# EAGLE board 09B-11-A1-01 (EAGLE 6.3)
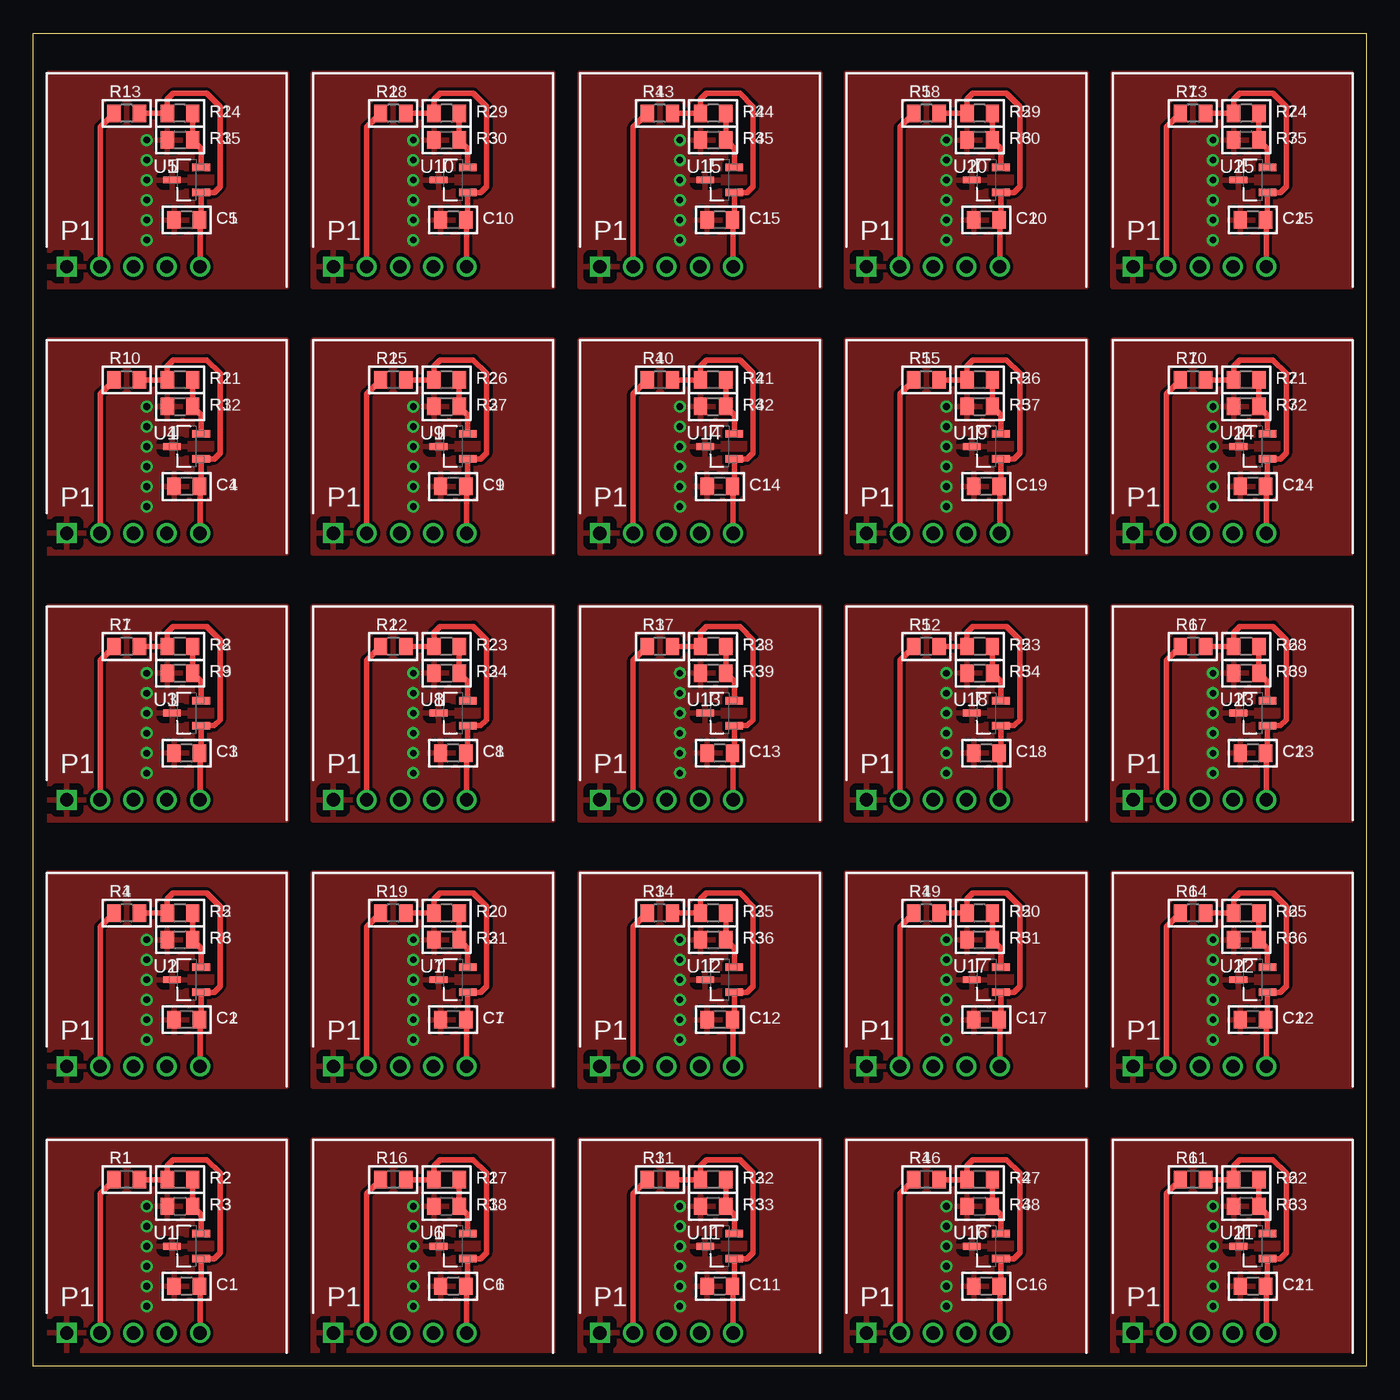
[diagram p0: board, top side]
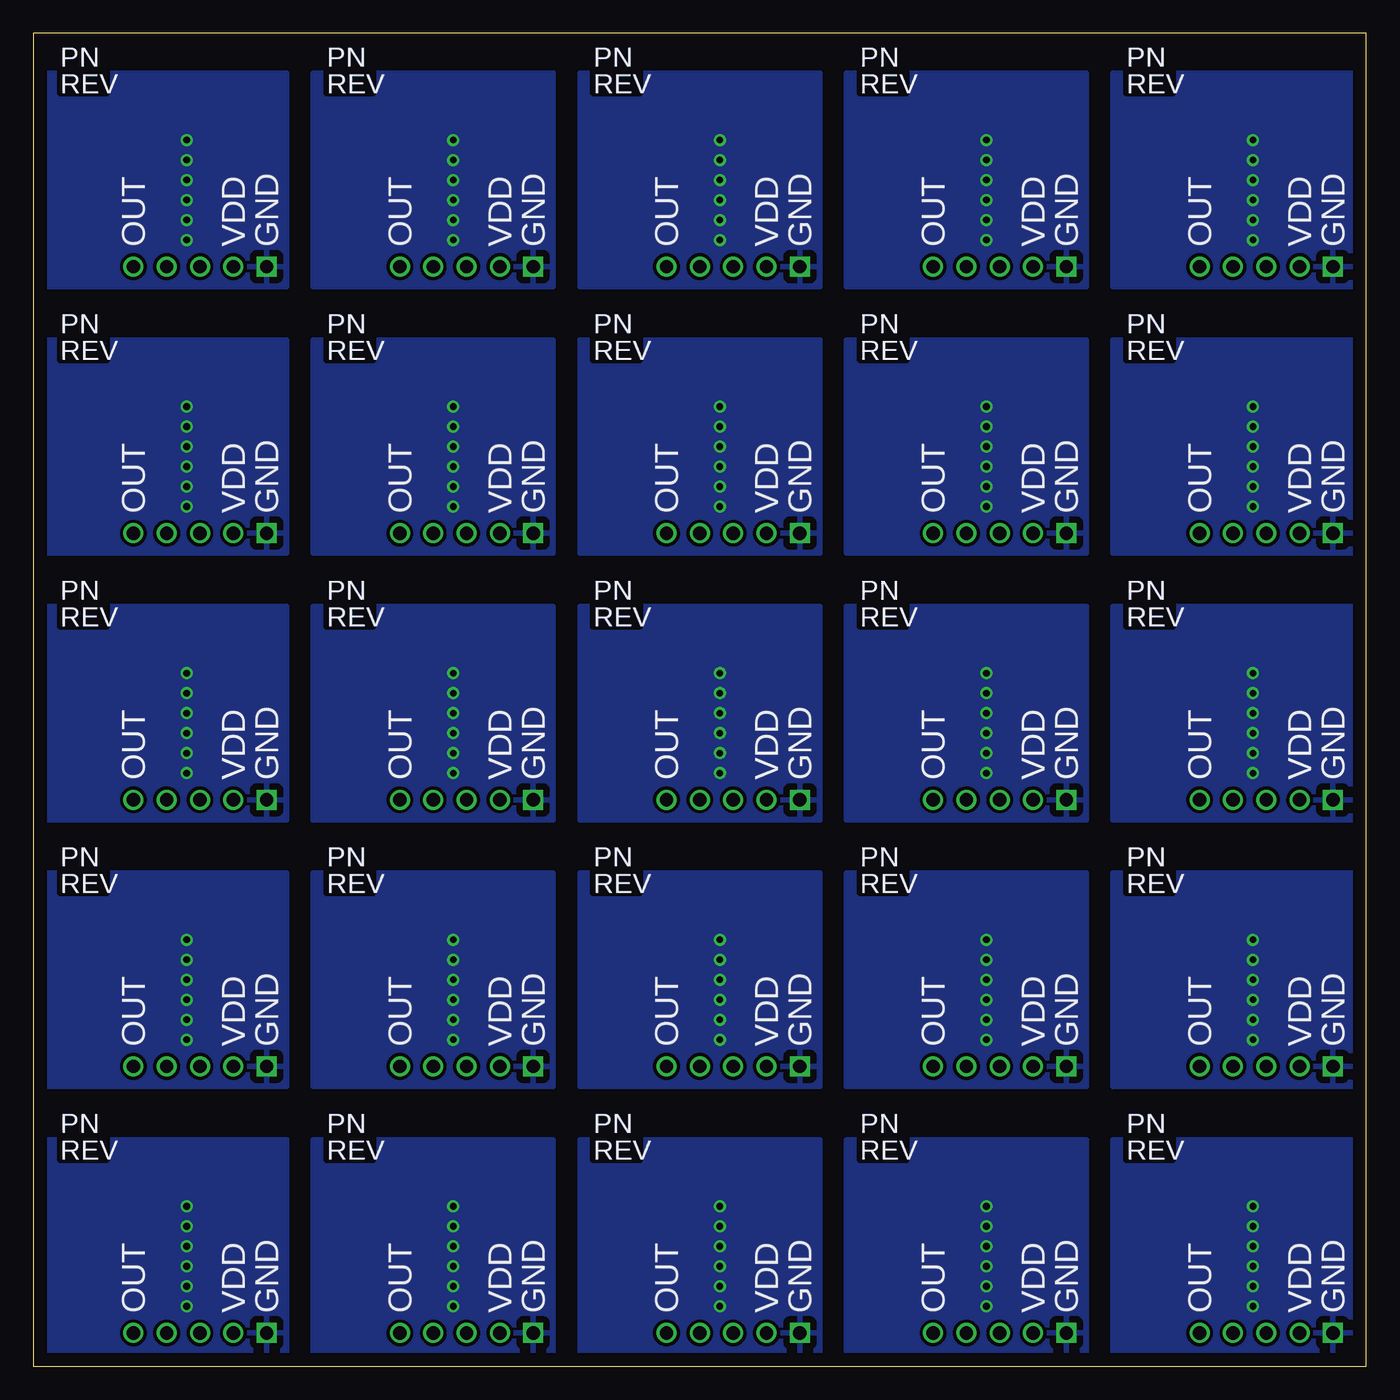
[diagram p1: board, bottom side, seen from below]

Size 100 x 100 mm. Coordinates in mm from the lower left corner, seen from the top.
Outline: 0,0 0,100 100,100 100,0 0,0
Copper layers (1*16): Top 0.035mm / dielectric 1.5mm / Bottom 0.035mm
Design rules "minipcb": minimum track width 0.2mm, minimum drill 0.5mm, track to track 0.25mm, track to pad 0.5mm, pad to pad 0.5mm, via to via 0.5mm, smd to smd 0.15mm, copper to edge 1mm, drill to drill 1mm, minimum pad ring 0.2mm, minimum via ring 0.2mm, stop-mask expansion 0.1mm, vias tented up to drill 0.6mm, thermal gap 0.5mm

## Footprints (pad centres in the part's own frame; a part is rotated, then mirrored left to right if it is on the bottom)
C0805 = smd 1 x 1.3: 1ASD -0.95,0; 2ASDF 0.95,0
PINS_1X5 = drill 1 square: 1 0,0 | drill 1: 2 2.5,0; 3 5,0; 4 7.5,0; 5 10,0
R0805 = smd 1 x 1.3: 1 -0.95,0; 2 0.95,0
SOT95P237X112-3N = smd 1.321 x 0.559: 1 -1.092,0.94; 2 -1.092,-0.94 | smd 1.321 x 0.508: 3 1.092,0

## Placement (x,y rotation side)
C1  [C0805]  11.5,6 180 top
C2  [C0805]  11.5,26 180 top
C3  [C0805]  11.5,46 180 top
C4  [C0805]  11.5,66 180 top
C5  [C0805]  11.5,86 180 top
C6  [C0805]  31.5,6 180 top
C7  [C0805]  31.5,26 180 top
C8  [C0805]  31.5,46 180 top
C9  [C0805]  31.5,66 180 top
C10  [C0805]  31.5,86 180 top
C11  [C0805]  51.5,6 180 top
C12  [C0805]  51.5,26 180 top
C13  [C0805]  51.5,46 180 top
C14  [C0805]  51.5,66 180 top
C15  [C0805]  51.5,86 180 top
C16  [C0805]  71.5,6 180 top
C17  [C0805]  71.5,26 180 top
C18  [C0805]  71.5,46 180 top
C19  [C0805]  71.5,66 180 top
C20  [C0805]  71.5,86 180 top
C21  [C0805]  91.5,6 180 top
C22  [C0805]  91.5,26 180 top
C23  [C0805]  91.5,46 180 top
C24  [C0805]  91.5,66 180 top
C25  [C0805]  91.5,86 180 top
P1  [PINS_1X5]  2.5,2.5 0 top
P2  [PINS_1X5]  2.5,22.5 0 top
P3  [PINS_1X5]  2.5,42.5 0 top
P4  [PINS_1X5]  2.5,62.5 0 top
P5  [PINS_1X5]  2.5,82.5 0 top
P6  [PINS_1X5]  22.5,2.5 0 top
P7  [PINS_1X5]  22.5,22.5 0 top
P8  [PINS_1X5]  22.5,42.5 0 top
P9  [PINS_1X5]  22.5,62.5 0 top
P10  [PINS_1X5]  22.5,82.5 0 top
P11  [PINS_1X5]  42.5,2.5 0 top
P12  [PINS_1X5]  42.5,22.5 0 top
P13  [PINS_1X5]  42.5,42.5 0 top
P14  [PINS_1X5]  42.5,62.5 0 top
P15  [PINS_1X5]  42.5,82.5 0 top
P16  [PINS_1X5]  62.5,2.5 0 top
P17  [PINS_1X5]  62.5,22.5 0 top
P18  [PINS_1X5]  62.5,42.5 0 top
P19  [PINS_1X5]  62.5,62.5 0 top
P20  [PINS_1X5]  62.5,82.5 0 top
P21  [PINS_1X5]  82.5,2.5 0 top
P22  [PINS_1X5]  82.5,22.5 0 top
P23  [PINS_1X5]  82.5,42.5 0 top
P24  [PINS_1X5]  82.5,62.5 0 top
P25  [PINS_1X5]  82.5,82.5 0 top
PCB1  [PCB20-20]  0,0 0 top
PCB2  [PCB20-20]  0,20 0 top
PCB3  [PCB20-20]  0,40 0 top
PCB4  [PCB20-20]  0,60 0 top
PCB5  [PCB20-20]  0,80 0 top
PCB6  [PCB20-20]  20,0 0 top
PCB7  [PCB20-20]  20,20 0 top
PCB8  [PCB20-20]  20,40 0 top
PCB9  [PCB20-20]  20,60 0 top
PCB10  [PCB20-20]  20,80 0 top
PCB11  [PCB20-20]  40,0 0 top
PCB12  [PCB20-20]  40,20 0 top
PCB13  [PCB20-20]  40,40 0 top
PCB14  [PCB20-20]  40,60 0 top
PCB15  [PCB20-20]  40,80 0 top
PCB16  [PCB20-20]  60,0 0 top
PCB17  [PCB20-20]  60,20 0 top
PCB18  [PCB20-20]  60,40 0 top
PCB19  [PCB20-20]  60,60 0 top
PCB20  [PCB20-20]  60,80 0 top
PCB21  [PCB20-20]  80,0 0 top
PCB22  [PCB20-20]  80,20 0 top
PCB23  [PCB20-20]  80,40 0 top
PCB24  [PCB20-20]  80,60 0 top
PCB25  [PCB20-20]  80,80 0 top
R1  [R0805]  7,14 180 top
R2  [R0805]  11,14 180 top
R3  [R0805]  11,12 0 top
R4  [R0805]  7,34 180 top
R5  [R0805]  11,34 180 top
R6  [R0805]  11,32 0 top
R7  [R0805]  7,54 180 top
R8  [R0805]  11,54 180 top
R9  [R0805]  11,52 0 top
R10  [R0805]  7,74 180 top
R11  [R0805]  11,74 180 top
R12  [R0805]  11,72 0 top
R13  [R0805]  7,94 180 top
R14  [R0805]  11,94 180 top
R15  [R0805]  11,92 0 top
R16  [R0805]  27,14 180 top
R17  [R0805]  31,14 180 top
R18  [R0805]  31,12 0 top
R19  [R0805]  27,34 180 top
R20  [R0805]  31,34 180 top
R21  [R0805]  31,32 0 top
R22  [R0805]  27,54 180 top
R23  [R0805]  31,54 180 top
R24  [R0805]  31,52 0 top
R25  [R0805]  27,74 180 top
R26  [R0805]  31,74 180 top
R27  [R0805]  31,72 0 top
R28  [R0805]  27,94 180 top
R29  [R0805]  31,94 180 top
R30  [R0805]  31,92 0 top
R31  [R0805]  47,14 180 top
R32  [R0805]  51,14 180 top
R33  [R0805]  51,12 0 top
R34  [R0805]  47,34 180 top
R35  [R0805]  51,34 180 top
R36  [R0805]  51,32 0 top
R37  [R0805]  47,54 180 top
R38  [R0805]  51,54 180 top
R39  [R0805]  51,52 0 top
R40  [R0805]  47,74 180 top
R41  [R0805]  51,74 180 top
R42  [R0805]  51,72 0 top
R43  [R0805]  47,94 180 top
R44  [R0805]  51,94 180 top
R45  [R0805]  51,92 0 top
R46  [R0805]  67,14 180 top
R47  [R0805]  71,14 180 top
R48  [R0805]  71,12 0 top
R49  [R0805]  67,34 180 top
R50  [R0805]  71,34 180 top
R51  [R0805]  71,32 0 top
R52  [R0805]  67,54 180 top
R53  [R0805]  71,54 180 top
R54  [R0805]  71,52 0 top
R55  [R0805]  67,74 180 top
R56  [R0805]  71,74 180 top
R57  [R0805]  71,72 0 top
R58  [R0805]  67,94 180 top
R59  [R0805]  71,94 180 top
R60  [R0805]  71,92 0 top
R61  [R0805]  87,14 180 top
R62  [R0805]  91,14 180 top
R63  [R0805]  91,12 0 top
R64  [R0805]  87,34 180 top
R65  [R0805]  91,34 180 top
R66  [R0805]  91,32 0 top
R67  [R0805]  87,54 180 top
R68  [R0805]  91,54 180 top
R69  [R0805]  91,52 0 top
R70  [R0805]  87,74 180 top
R71  [R0805]  91,74 180 top
R72  [R0805]  91,72 0 top
R73  [R0805]  87,94 180 top
R74  [R0805]  91,94 180 top
R75  [R0805]  91,92 0 top
U1  TL432BQDBZRQ1  [SOT95P237X112-3N]  11.5,9 180 top
U2  TL432BQDBZRQ1  [SOT95P237X112-3N]  11.5,29 180 top
U3  TL432BQDBZRQ1  [SOT95P237X112-3N]  11.5,49 180 top
U4  TL432BQDBZRQ1  [SOT95P237X112-3N]  11.5,69 180 top
U5  TL432BQDBZRQ1  [SOT95P237X112-3N]  11.5,89 180 top
U6  TL432BQDBZRQ1  [SOT95P237X112-3N]  31.5,9 180 top
U7  TL432BQDBZRQ1  [SOT95P237X112-3N]  31.5,29 180 top
U8  TL432BQDBZRQ1  [SOT95P237X112-3N]  31.5,49 180 top
U9  TL432BQDBZRQ1  [SOT95P237X112-3N]  31.5,69 180 top
U10  TL432BQDBZRQ1  [SOT95P237X112-3N]  31.5,89 180 top
U11  TL432BQDBZRQ1  [SOT95P237X112-3N]  51.5,9 180 top
U12  TL432BQDBZRQ1  [SOT95P237X112-3N]  51.5,29 180 top
U13  TL432BQDBZRQ1  [SOT95P237X112-3N]  51.5,49 180 top
U14  TL432BQDBZRQ1  [SOT95P237X112-3N]  51.5,69 180 top
U15  TL432BQDBZRQ1  [SOT95P237X112-3N]  51.5,89 180 top
U16  TL432BQDBZRQ1  [SOT95P237X112-3N]  71.5,9 180 top
U17  TL432BQDBZRQ1  [SOT95P237X112-3N]  71.5,29 180 top
U18  TL432BQDBZRQ1  [SOT95P237X112-3N]  71.5,49 180 top
U19  TL432BQDBZRQ1  [SOT95P237X112-3N]  71.5,69 180 top
U20  TL432BQDBZRQ1  [SOT95P237X112-3N]  71.5,89 180 top
U21  TL432BQDBZRQ1  [SOT95P237X112-3N]  91.5,9 180 top
U22  TL432BQDBZRQ1  [SOT95P237X112-3N]  91.5,29 180 top
U23  TL432BQDBZRQ1  [SOT95P237X112-3N]  91.5,49 180 top
U24  TL432BQDBZRQ1  [SOT95P237X112-3N]  91.5,69 180 top
U25  TL432BQDBZRQ1  [SOT95P237X112-3N]  91.5,89 180 top

## Library data of the parts
C1-C25 P1-P25 R1-R75 = minipcb
PCB1-PCB25 = minipcb; PART_NUMBER: 09B-11; REVISION: A1-01; TITLE: TL432-EVAL
U1-U25 = minipcb; AVAILABILITY: In Stock; CHECK_PRICES: https://www.snapeda.com/parts/TL432BQDBZRQ1/Texas+Instruments/view-part/?ref=eda; DESCRIPTION: Automotive adjustable precision shunt regulator (pin layout: RKA); MF: Texas Instruments; MP: TL432BQDBZRQ1; PACKAGE: SOT-23-3 Texas Instruments; PRICE: None; SNAPEDA_LINK: https://www.snapeda.com/parts/TL432BQDBZRQ1/Texas+Instruments/view-part/?ref=snap

## Nets
GND20: C1.2ASDF P1.1 R3.1 U1.3
GND21: C2.2ASDF P2.1 R6.1 U2.3
GND22: C3.2ASDF P3.1 R9.1 U3.3
GND23: C4.2ASDF P4.1 R12.1 U4.3
GND24: C5.2ASDF P5.1 R15.1 U5.3
GND25: C6.2ASDF P6.1 R18.1 U6.3
GND26: C7.2ASDF P7.1 R21.1 U7.3
GND27: C8.2ASDF P8.1 R24.1 U8.3
GND28: C9.2ASDF P9.1 R27.1 U9.3
GND29: C10.2ASDF P10.1 R30.1 U10.3
GND30: C11.2ASDF P11.1 R33.1 U11.3
GND31: C12.2ASDF P12.1 R36.1 U12.3
GND32: C13.2ASDF P13.1 R39.1 U13.3
GND33: C14.2ASDF P14.1 R42.1 U14.3
GND34: C15.2ASDF P15.1 R45.1 U15.3
GND35: C16.2ASDF P16.1 R48.1 U16.3
GND36: C17.2ASDF P17.1 R51.1 U17.3
GND37: C18.2ASDF P18.1 R54.1 U18.3
GND38: C19.2ASDF P19.1 R57.1 U19.3
GND39: C20.2ASDF P20.1 R60.1 U20.3
GND40: C21.2ASDF P21.1 R63.1 U21.3
GND41: C22.2ASDF P22.1 R66.1 U22.3
GND42: C23.2ASDF P23.1 R69.1 U23.3
GND43: C24.2ASDF P24.1 R72.1 U24.3
GND44: C25.2ASDF P25.1 R75.1 U25.3
N$1: C1.1ASD P1.5 R1.1 R2.2 U1.1
N$2: R2.1 R3.2 U1.2
N$3: C2.1ASD P2.5 R4.1 R5.2 U2.1
N$4: R5.1 R6.2 U2.2
N$5: C3.1ASD P3.5 R7.1 R8.2 U3.1
N$6: R8.1 R9.2 U3.2
N$7: C4.1ASD P4.5 R10.1 R11.2 U4.1
N$8: R11.1 R12.2 U4.2
N$9: C5.1ASD P5.5 R13.1 R14.2 U5.1
N$10: R14.1 R15.2 U5.2
N$11: C6.1ASD P6.5 R16.1 R17.2 U6.1
N$12: R17.1 R18.2 U6.2
N$13: C7.1ASD P7.5 R19.1 R20.2 U7.1
N$14: R20.1 R21.2 U7.2
N$15: C8.1ASD P8.5 R22.1 R23.2 U8.1
N$16: R23.1 R24.2 U8.2
N$17: C9.1ASD P9.5 R25.1 R26.2 U9.1
N$18: R26.1 R27.2 U9.2
N$19: C10.1ASD P10.5 R28.1 R29.2 U10.1
N$20: R29.1 R30.2 U10.2
N$21: C11.1ASD P11.5 R31.1 R32.2 U11.1
N$22: R32.1 R33.2 U11.2
N$23: C12.1ASD P12.5 R34.1 R35.2 U12.1
N$24: R35.1 R36.2 U12.2
N$25: C13.1ASD P13.5 R37.1 R38.2 U13.1
N$26: R38.1 R39.2 U13.2
N$27: C14.1ASD P14.5 R40.1 R41.2 U14.1
N$28: R41.1 R42.2 U14.2
N$29: C15.1ASD P15.5 R43.1 R44.2 U15.1
N$30: R44.1 R45.2 U15.2
N$31: C16.1ASD P16.5 R46.1 R47.2 U16.1
N$32: R47.1 R48.2 U16.2
N$33: C17.1ASD P17.5 R49.1 R50.2 U17.1
N$34: R50.1 R51.2 U17.2
N$35: C18.1ASD P18.5 R52.1 R53.2 U18.1
N$36: R53.1 R54.2 U18.2
N$37: C19.1ASD P19.5 R55.1 R56.2 U19.1
N$38: R56.1 R57.2 U19.2
N$39: C20.1ASD P20.5 R58.1 R59.2 U20.1
N$40: R59.1 R60.2 U20.2
N$41: C21.1ASD P21.5 R61.1 R62.2 U21.1
N$42: R62.1 R63.2 U21.2
N$43: C22.1ASD P22.5 R64.1 R65.2 U22.1
N$44: R65.1 R66.2 U22.2
N$45: C23.1ASD P23.5 R67.1 R68.2 U23.1
N$46: R68.1 R69.2 U23.2
N$47: C24.1ASD P24.5 R70.1 R71.2 U24.1
N$48: R71.1 R72.2 U24.2
N$49: C25.1ASD P25.5 R73.1 R74.2 U25.1
N$50: R74.1 R75.2 U25.2
V+: P1.2 R1.2
V+1: P2.2 R4.2
V+2: P3.2 R7.2
V+3: P4.2 R10.2
V+4: P5.2 R13.2
V+5: P6.2 R16.2
V+6: P7.2 R19.2
V+7: P8.2 R22.2
V+8: P9.2 R25.2
V+9: P10.2 R28.2
V+10: P11.2 R31.2
V+11: P12.2 R34.2
V+12: P13.2 R37.2
V+13: P14.2 R40.2
V+14: P15.2 R43.2
V+15: P16.2 R46.2
V+16: P17.2 R49.2
V+17: P18.2 R52.2
V+18: P19.2 R55.2
V+19: P20.2 R58.2
V+20: P21.2 R61.2
V+21: P22.2 R64.2
V+22: P23.2 R67.2
V+23: P24.2 R70.2
V+24: P25.2 R73.2

## Tracks (layer width: path | path; a pad name or v marks a point on that pad's centre or on a via)
GND20  (via drill 0.5)
  other vias: 8.5,12 8.5,9 8.5,6 8.5,7.5 8.5,4.5 8.5,10.5
  pour Bottom: 1,1 19,1 19,17 1,17
  pour Top: 1,1 19,1 19,17 1,17
GND21  (via drill 0.5)
  other vias: 8.5,32 8.5,29 8.5,26 8.5,27.5 8.5,24.5 8.5,30.5
  pour Bottom: 1,21 19,21 19,37 1,37
  pour Top: 1,21 19,21 19,37 1,37
GND22  (via drill 0.5)
  other vias: 8.5,52 8.5,49 8.5,46 8.5,47.5 8.5,44.5 8.5,50.5
  pour Bottom: 1,41 19,41 19,57 1,57
  pour Top: 1,41 19,41 19,57 1,57
GND23  (via drill 0.5)
  other vias: 8.5,72 8.5,69 8.5,66 8.5,67.5 8.5,64.5 8.5,70.5
  pour Bottom: 1,61 19,61 19,77 1,77
  pour Top: 1,61 19,61 19,77 1,77
GND24  (via drill 0.5)
  other vias: 8.5,92 8.5,89 8.5,86 8.5,87.5 8.5,84.5 8.5,90.5
  pour Bottom: 1,81 19,81 19,97 1,97
  pour Top: 1,81 19,81 19,97 1,97
GND25  (via drill 0.5)
  other vias: 28.5,12 28.5,9 28.5,6 28.5,7.5 28.5,4.5 28.5,10.5
  pour Bottom: 21,1 39,1 39,17 21,17
  pour Top: 21,1 39,1 39,17 21,17
GND26  (via drill 0.5)
  other vias: 28.5,32 28.5,29 28.5,26 28.5,27.5 28.5,24.5 28.5,30.5
  pour Bottom: 21,21 39,21 39,37 21,37
  pour Top: 21,21 39,21 39,37 21,37
GND27  (via drill 0.5)
  other vias: 28.5,52 28.5,49 28.5,46 28.5,47.5 28.5,44.5 28.5,50.5
  pour Bottom: 21,41 39,41 39,57 21,57
  pour Top: 21,41 39,41 39,57 21,57
GND28  (via drill 0.5)
  other vias: 28.5,72 28.5,69 28.5,66 28.5,67.5 28.5,64.5 28.5,70.5
  pour Bottom: 21,61 39,61 39,77 21,77
  pour Top: 21,61 39,61 39,77 21,77
GND29  (via drill 0.5)
  other vias: 28.5,92 28.5,89 28.5,86 28.5,87.5 28.5,84.5 28.5,90.5
  pour Bottom: 21,81 39,81 39,97 21,97
  pour Top: 21,81 39,81 39,97 21,97
GND30  (via drill 0.5)
  other vias: 48.5,12 48.5,9 48.5,6 48.5,7.5 48.5,4.5 48.5,10.5
  pour Bottom: 41,1 59,1 59,17 41,17
  pour Top: 41,1 59,1 59,17 41,17
GND31  (via drill 0.5)
  other vias: 48.5,32 48.5,29 48.5,26 48.5,27.5 48.5,24.5 48.5,30.5
  pour Bottom: 41,21 59,21 59,37 41,37
  pour Top: 41,21 59,21 59,37 41,37
GND32  (via drill 0.5)
  other vias: 48.5,52 48.5,49 48.5,46 48.5,47.5 48.5,44.5 48.5,50.5
  pour Bottom: 41,41 59,41 59,57 41,57
  pour Top: 41,41 59,41 59,57 41,57
GND33  (via drill 0.5)
  other vias: 48.5,72 48.5,69 48.5,66 48.5,67.5 48.5,64.5 48.5,70.5
  pour Bottom: 41,61 59,61 59,77 41,77
  pour Top: 41,61 59,61 59,77 41,77
GND34  (via drill 0.5)
  other vias: 48.5,92 48.5,89 48.5,86 48.5,87.5 48.5,84.5 48.5,90.5
  pour Bottom: 41,81 59,81 59,97 41,97
  pour Top: 41,81 59,81 59,97 41,97
GND35  (via drill 0.5)
  other vias: 68.5,12 68.5,9 68.5,6 68.5,7.5 68.5,4.5 68.5,10.5
  pour Bottom: 61,1 79,1 79,17 61,17
  pour Top: 61,1 79,1 79,17 61,17
GND36  (via drill 0.5)
  other vias: 68.5,32 68.5,29 68.5,26 68.5,27.5 68.5,24.5 68.5,30.5
  pour Bottom: 61,21 79,21 79,37 61,37
  pour Top: 61,21 79,21 79,37 61,37
GND37  (via drill 0.5)
  other vias: 68.5,52 68.5,49 68.5,46 68.5,47.5 68.5,44.5 68.5,50.5
  pour Bottom: 61,41 79,41 79,57 61,57
  pour Top: 61,41 79,41 79,57 61,57
GND38  (via drill 0.5)
  other vias: 68.5,72 68.5,69 68.5,66 68.5,67.5 68.5,64.5 68.5,70.5
  pour Bottom: 61,61 79,61 79,77 61,77
  pour Top: 61,61 79,61 79,77 61,77
GND39  (via drill 0.5)
  other vias: 68.5,92 68.5,89 68.5,86 68.5,87.5 68.5,84.5 68.5,90.5
  pour Bottom: 61,81 79,81 79,97 61,97
  pour Top: 61,81 79,81 79,97 61,97
GND40  (via drill 0.5)
  other vias: 88.5,12 88.5,9 88.5,6 88.5,7.5 88.5,4.5 88.5,10.5
  pour Bottom: 81,1 99,1 99,17 81,17
  pour Top: 81,1 99,1 99,17 81,17
GND41  (via drill 0.5)
  other vias: 88.5,32 88.5,29 88.5,26 88.5,27.5 88.5,24.5 88.5,30.5
  pour Bottom: 81,21 99,21 99,37 81,37
  pour Top: 81,21 99,21 99,37 81,37
GND42  (via drill 0.5)
  other vias: 88.5,52 88.5,49 88.5,46 88.5,47.5 88.5,44.5 88.5,50.5
  pour Bottom: 81,41 99,41 99,57 81,57
  pour Top: 81,41 99,41 99,57 81,57
GND43  (via drill 0.5)
  other vias: 88.5,72 88.5,69 88.5,66 88.5,67.5 88.5,64.5 88.5,70.5
  pour Bottom: 81,61 99,61 99,77 81,77
  pour Top: 81,61 99,61 99,77 81,77
GND44  (via drill 0.5)
  other vias: 88.5,92 88.5,89 88.5,86 88.5,87.5 88.5,84.5 88.5,90.5
  pour Bottom: 81,81 99,81 99,97 81,97
  pour Top: 81,81 99,81 99,97 81,97
N$1
  Top 0.406: R1.1 R2.2 10.05,15.05 10.5,15.5 13,15.5 14,14.5 14,8.5 13.56,8.06 U1.1 12.59,6.14 C1.1ASD arc-90 12.5,5.95 P1.5
N$2
  Top 0.406: R2.1 R3.2 12.59,11.36 U1.2
N$3
  Top 0.406: R4.1 R5.2 10.05,35.05 10.5,35.5 13,35.5 14,34.5 14,28.5 13.56,28.06 U2.1 12.59,26.14 C2.1ASD arc-90 12.5,25.95 P2.5
N$4
  Top 0.406: R5.1 R6.2 12.59,31.36 U2.2
N$5
  Top 0.406: R7.1 R8.2 10.05,55.05 10.5,55.5 13,55.5 14,54.5 14,48.5 13.56,48.06 U3.1 12.59,46.14 C3.1ASD arc-90 12.5,45.95 P3.5
N$6
  Top 0.406: R8.1 R9.2 12.59,51.36 U3.2
N$7
  Top 0.406: R10.1 R11.2 10.05,75.05 10.5,75.5 13,75.5 14,74.5 14,68.5 13.56,68.06 U4.1 12.59,66.14 C4.1ASD arc-90 12.5,65.95 P4.5
N$8
  Top 0.406: R11.1 R12.2 12.59,71.36 U4.2
N$9
  Top 0.406: R13.1 R14.2 10.05,95.05 10.5,95.5 13,95.5 14,94.5 14,88.5 13.56,88.06 U5.1 12.59,86.14 C5.1ASD arc-90 12.5,85.95 P5.5
N$10
  Top 0.406: R14.1 R15.2 12.59,91.36 U5.2
N$11
  Top 0.406: R16.1 R17.2 30.05,15.05 30.5,15.5 33,15.5 34,14.5 34,8.5 33.56,8.06 U6.1 32.59,6.14 C6.1ASD arc-90 32.5,5.95 P6.5
N$12
  Top 0.406: R17.1 R18.2 32.59,11.36 U6.2
N$13
  Top 0.406: R19.1 R20.2 30.05,35.05 30.5,35.5 33,35.5 34,34.5 34,28.5 33.56,28.06 U7.1 32.59,26.14 C7.1ASD arc-90 32.5,25.95 P7.5
N$14
  Top 0.406: R20.1 R21.2 32.59,31.36 U7.2
N$15
  Top 0.406: R22.1 R23.2 30.05,55.05 30.5,55.5 33,55.5 34,54.5 34,48.5 33.56,48.06 U8.1 32.59,46.14 C8.1ASD arc-90 32.5,45.95 P8.5
N$16
  Top 0.406: R23.1 R24.2 32.59,51.36 U8.2
N$17
  Top 0.406: R25.1 R26.2 30.05,75.05 30.5,75.5 33,75.5 34,74.5 34,68.5 33.56,68.06 U9.1 32.59,66.14 C9.1ASD arc-90 32.5,65.95 P9.5
N$18
  Top 0.406: R26.1 R27.2 32.59,71.36 U9.2
N$19
  Top 0.406: R28.1 R29.2 30.05,95.05 30.5,95.5 33,95.5 34,94.5 34,88.5 33.56,88.06 U10.1 32.59,86.14 C10.1ASD arc-90 32.5,85.95 P10.5
N$20
  Top 0.406: R29.1 R30.2 32.59,91.36 U10.2
N$21
  Top 0.406: R31.1 R32.2 50.05,15.05 50.5,15.5 53,15.5 54,14.5 54,8.5 53.56,8.06 U11.1 52.59,6.14 C11.1ASD arc-90 52.5,5.95 P11.5
N$22
  Top 0.406: R32.1 R33.2 52.59,11.36 U11.2
N$23
  Top 0.406: R34.1 R35.2 50.05,35.05 50.5,35.5 53,35.5 54,34.5 54,28.5 53.56,28.06 U12.1 52.59,26.14 C12.1ASD arc-90 52.5,25.95 P12.5
N$24
  Top 0.406: R35.1 R36.2 52.59,31.36 U12.2
N$25
  Top 0.406: R37.1 R38.2 50.05,55.05 50.5,55.5 53,55.5 54,54.5 54,48.5 53.56,48.06 U13.1 52.59,46.14 C13.1ASD arc-90 52.5,45.95 P13.5
N$26
  Top 0.406: R38.1 R39.2 52.59,51.36 U13.2
N$27
  Top 0.406: R40.1 R41.2 50.05,75.05 50.5,75.5 53,75.5 54,74.5 54,68.5 53.56,68.06 U14.1 52.59,66.14 C14.1ASD arc-90 52.5,65.95 P14.5
N$28
  Top 0.406: R41.1 R42.2 52.59,71.36 U14.2
N$29
  Top 0.406: R43.1 R44.2 50.05,95.05 50.5,95.5 53,95.5 54,94.5 54,88.5 53.56,88.06 U15.1 52.59,86.14 C15.1ASD arc-90 52.5,85.95 P15.5
N$30
  Top 0.406: R44.1 R45.2 52.59,91.36 U15.2
N$31
  Top 0.406: R46.1 R47.2 70.05,15.05 70.5,15.5 73,15.5 74,14.5 74,8.5 73.56,8.06 U16.1 72.59,6.14 C16.1ASD arc-90 72.5,5.95 P16.5
N$32
  Top 0.406: R47.1 R48.2 72.59,11.36 U16.2
N$33
  Top 0.406: R49.1 R50.2 70.05,35.05 70.5,35.5 73,35.5 74,34.5 74,28.5 73.56,28.06 U17.1 72.59,26.14 C17.1ASD arc-90 72.5,25.95 P17.5
N$34
  Top 0.406: R50.1 R51.2 72.59,31.36 U17.2
N$35
  Top 0.406: R52.1 R53.2 70.05,55.05 70.5,55.5 73,55.5 74,54.5 74,48.5 73.56,48.06 U18.1 72.59,46.14 C18.1ASD arc-90 72.5,45.95 P18.5
N$36
  Top 0.406: R53.1 R54.2 72.59,51.36 U18.2
N$37
  Top 0.406: R55.1 R56.2 70.05,75.05 70.5,75.5 73,75.5 74,74.5 74,68.5 73.56,68.06 U19.1 72.59,66.14 C19.1ASD arc-90 72.5,65.95 P19.5
N$38
  Top 0.406: R56.1 R57.2 72.59,71.36 U19.2
N$39
  Top 0.406: R58.1 R59.2 70.05,95.05 70.5,95.5 73,95.5 74,94.5 74,88.5 73.56,88.06 U20.1 72.59,86.14 C20.1ASD arc-90 72.5,85.95 P20.5
N$40
  Top 0.406: R59.1 R60.2 72.59,91.36 U20.2
N$41
  Top 0.406: R61.1 R62.2 90.05,15.05 90.5,15.5 93,15.5 94,14.5 94,8.5 93.56,8.06 U21.1 92.59,6.14 C21.1ASD arc-90 92.5,5.95 P21.5
N$42
  Top 0.406: R62.1 R63.2 92.59,11.36 U21.2
N$43
  Top 0.406: R64.1 R65.2 90.05,35.05 90.5,35.5 93,35.5 94,34.5 94,28.5 93.56,28.06 U22.1 92.59,26.14 C22.1ASD arc-90 92.5,25.95 P22.5
N$44
  Top 0.406: R65.1 R66.2 92.59,31.36 U22.2
N$45
  Top 0.406: R67.1 R68.2 90.05,55.05 90.5,55.5 93,55.5 94,54.5 94,48.5 93.56,48.06 U23.1 92.59,46.14 C23.1ASD arc-90 92.5,45.95 P23.5
N$46
  Top 0.406: R68.1 R69.2 92.59,51.36 U23.2
N$47
  Top 0.406: R70.1 R71.2 90.05,75.05 90.5,75.5 93,75.5 94,74.5 94,68.5 93.56,68.06 U24.1 92.59,66.14 C24.1ASD arc-90 92.5,65.95 P24.5
N$48
  Top 0.406: R71.1 R72.2 92.59,71.36 U24.2
N$49
  Top 0.406: R73.1 R74.2 90.05,95.05 90.5,95.5 93,95.5 94,94.5 94,88.5 93.56,88.06 U25.1 92.59,86.14 C25.1ASD arc-90 92.5,85.95 P25.5
N$50
  Top 0.406: R74.1 R75.2 92.59,91.36 U25.2
V+
  Top 0.406: P1.2 5,12.95 R1.2
V+1
  Top 0.406: P2.2 5,32.95 R4.2
V+2
  Top 0.406: P3.2 5,52.95 R7.2
V+3
  Top 0.406: P4.2 5,72.95 R10.2
V+4
  Top 0.406: P5.2 5,92.95 R13.2
V+5
  Top 0.406: P6.2 25,12.95 R16.2
V+6
  Top 0.406: P7.2 25,32.95 R19.2
V+7
  Top 0.406: P8.2 25,52.95 R22.2
V+8
  Top 0.406: P9.2 25,72.95 R25.2
V+9
  Top 0.406: P10.2 25,92.95 R28.2
V+10
  Top 0.406: P11.2 45,12.95 R31.2
V+11
  Top 0.406: P12.2 45,32.95 R34.2
V+12
  Top 0.406: P13.2 45,52.95 R37.2
V+13
  Top 0.406: P14.2 45,72.95 R40.2
V+14
  Top 0.406: P15.2 45,92.95 R43.2
V+15
  Top 0.406: P16.2 65,12.95 R46.2
V+16
  Top 0.406: P17.2 65,32.95 R49.2
V+17
  Top 0.406: P18.2 65,52.95 R52.2
V+18
  Top 0.406: P19.2 65,72.95 R55.2
V+19
  Top 0.406: P20.2 65,92.95 R58.2
V+20
  Top 0.406: P21.2 85,12.95 R61.2
V+21
  Top 0.406: P22.2 85,32.95 R64.2
V+22
  Top 0.406: P23.2 85,52.95 R67.2
V+23
  Top 0.406: P24.2 85,72.95 R70.2
V+24
  Top 0.406: P25.2 85,92.95 R73.2

## Text on the board
bPlace: GND | VDD | OUT | GND | VDD | OUT | GND | VDD | OUT | GND | VDD | OUT | GND | VDD | OUT | GND | VDD | OUT | GND | VDD | OUT | GND | VDD | OUT | GND | VDD | OUT | GND | VDD | OUT | GND | VDD | OUT | GND | VDD | OUT | GND | VDD | OUT | GND | VDD | OUT | GND | VDD | OUT | GND | VDD | OUT | GND | VDD | OUT | GND | VDD | OUT | GND | VDD | OUT | GND | VDD | OUT | GND | VDD | OUT | GND | VDD | OUT | GND | VDD | OUT | GND | VDD | OUT | GND | VDD | OUT
_tNames: R1 | R1 | R1 | R1 | R1 | R2 | R2 | R2 | R2 | R2 | R3 | R3 | R3 | R3 | R3 | U1 | U1 | U1 | U1 | U1 | C1 | C1 | C1 | C1 | C1 | R1 | R1 | R1 | R1 | R1 | R2 | R2 | R2 | R2 | R2 | R3 | R3 | R3 | R3 | R3 | U1 | U1 | U1 | U1 | U1 | C1 | C1 | C1 | C1 | C1 | R1 | R1 | R1 | R1 | R1 | R2 | R2 | R2 | R2 | R2 | R3 | R3 | R3 | R3 | R3 | U1 | U1 | U1 | U1 | U1 | C1 | C1 | C1 | C1 | C1 | R1 | R1 | R1 | R1 | R1 | R2 | R2 | R2 | R2 | R2 | R3 | R3 | R3 | R3 | R3 | U1 | U1 | U1 | U1 | U1 | C1 | C1 | C1 | C1 | C1 | R1 | R1 | R1 | R1 | R1 | R2 | R2 | R2 | R2 | R2 | R3 | R3 | R3 | R3 | R3 | U1 | U1 | U1 | U1 | U1 | C1 | C1 | C1 | C1 | C1